# EAGLE board JDM2-2voltage-new-broken (EAGLE 7.6.0)
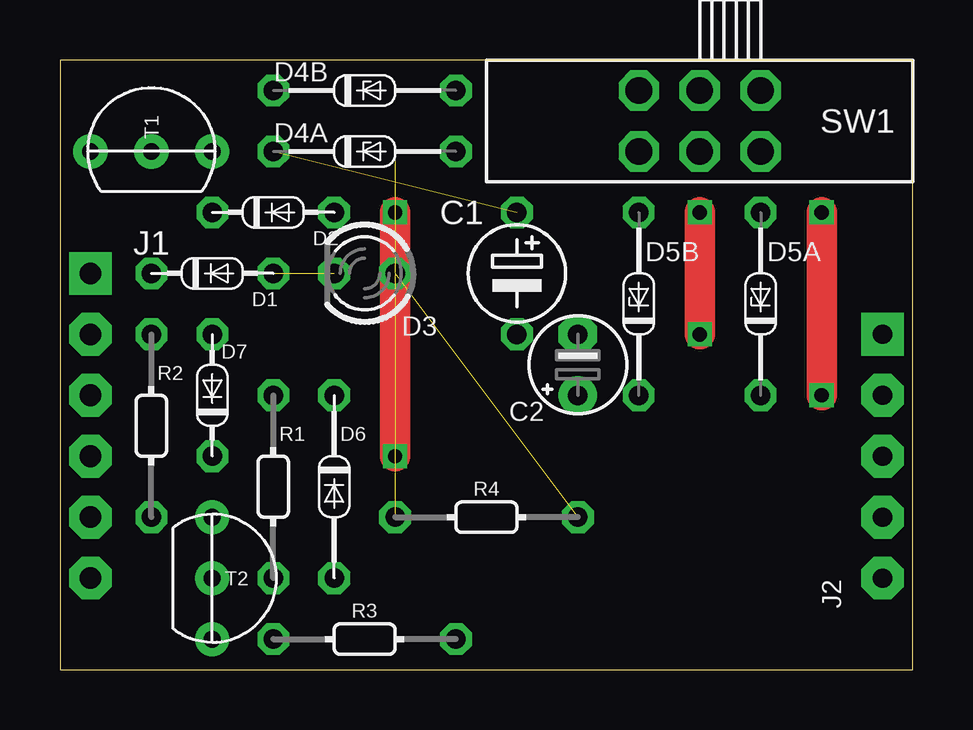
[diagram p0: board, top side]
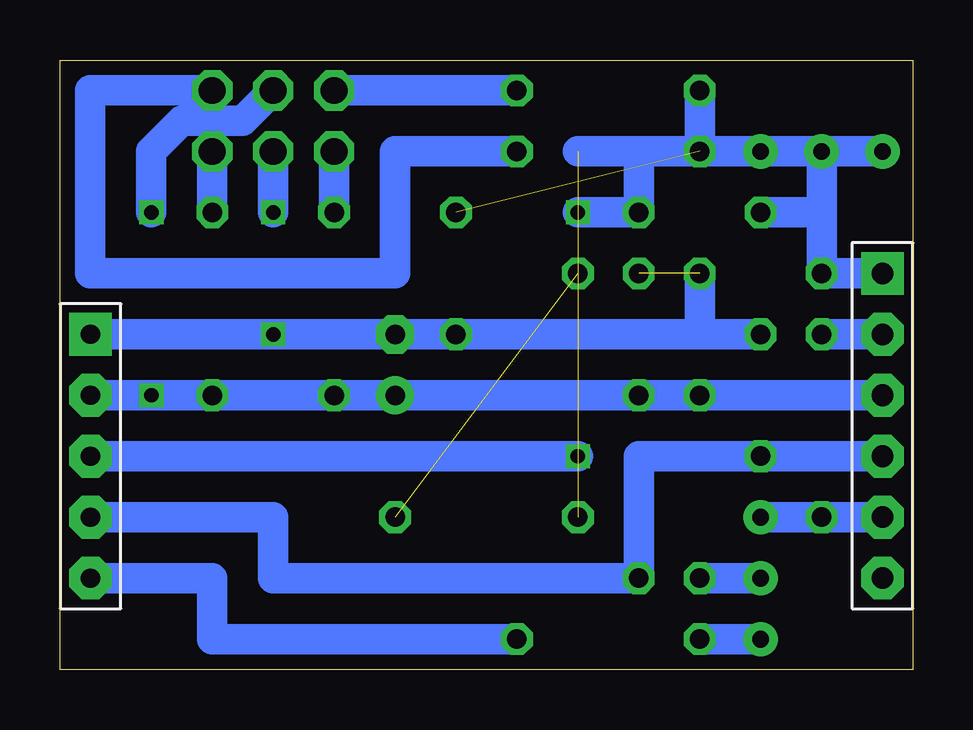
[diagram p1: board, bottom side, seen from below]

Size 35.56 x 25.4 mm. Coordinates in mm from the lower left corner, seen from the top.
Outline: 35.56,0 35.56,25.4 0,25.4 0,0 35.56,0
Copper layers (1*16): Top 0.035mm / dielectric 1.5mm / Bottom 0.035mm
Design rules "default": minimum track width 10mil, minimum drill 24mil, track to track 8mil, track to pad 8mil, pad to pad 8mil, via to via 8mil, smd to smd 8mil, copper to edge 40mil, drill to drill 8mil, minimum pad ring 10mil, minimum via ring 8mil, stop-mask expansion 4mil, vias tented up to drill 0mil, thermal gap 10mil
Net classes: 0 default: width 0.559 mm; 1 power: width 0.559 mm

## Footprints (pad centres in the part's own frame; a part is rotated, then mirrored left to right if it is on the bottom)
E5-4 = drill 0.813 octagon: + 0,2.54; - 0,-2.54
E2,5-4 = drill 0.813 pad 1.6: + 0,-1.27 | drill 0.813 pad 1.6 octagon: - 0,1.27
DO34-5 = drill 0.813 octagon: A 2.54,0; C -2.54,0
LED3MM = drill 0.813 octagon: A -1.27,0; K 1.27,0
DO34Z7 = drill 0.813 octagon: A 3.81,0; C -3.81,0
DO34Z7V = drill 0.813 octagon: A 0,3.81; C 0,-3.81
DO34-7V = drill 0.813 octagon: A 0,3.81; C 0,-3.81
DO34-5V = drill 0.813 octagon: A 0,2.54; C 0,-2.54
RS232-6PIN = drill 0.9 pad 1.778 square: 1 0,0 | drill 0.9 pad 1.778 octagon: 2 2.54,0; 3 5.08,0; 4 7.62,0; 5 10.16,0; 6 12.7,0
PIC-ICSP = drill 0.8 pad 1.778 square: 1 -5.08,0 | drill 0.8 pad 1.778 octagon: 2 -2.54,0; 3 0,0; 4 2.54,0; 5 5.08,0
0202/7-V = drill 0.813 octagon: 1 0,-3.81; 2 0,3.81
0202/7 = drill 0.813 octagon: 1 -3.81,0; 2 3.81,0
SLSW-2P2T-H = drill 1.118 pad 1.524 octagon: 1 2.54,1.27; 2 0,1.27; 3 -2.54,1.27; 4 2.54,-1.27; 5 0,-1.27; 6 -2.54,-1.27
TO92-CBE = drill 0.7 pad 1.422: B 0,0; C 0,2.54; E 0,-2.54

## Placement (x,y rotation side)
C1  100uF  [E5-4]  19.05,16.51 0 top
C2  22uF  [E2,5-4]  21.59,12.7 0 top
D1  1N4148  [DO34-5]  6.35,16.51 0 top
D2  1N4148  [DO34-5]  8.89,19.05 0 top
D3  LED (red)  [LED3MM]  12.7,16.51 180 top
D4A  Z=5.1V  [DO34Z7]  12.7,21.59 0 top
D4B  Z=8.1V  [DO34Z7]  12.7,24.13 0 top
D5A  Z=3.3V  [DO34Z7V]  29.21,15.24 0 top
D5B  Z=5.1V  [DO34Z7V]  24.13,15.24 0 top
D6  1N4148  [DO34-7V]  11.43,7.62 180 top
D7  1N4148  [DO34-5V]  6.35,11.43 0 top
J1  COMPORT-6PIN  [RS232-6PIN]  1.27,16.51 270 top
J2  PIC-ICSPICSP  [PIC-ICSP]  34.29,8.89 270 top
R1  10k  [0202/7-V]  8.89,7.62 0 top
R2  1.5k  [0202/7-V]  3.81,10.16 0 top
R3  100  [0202/7]  12.7,1.27 180 top
R4  3.3k  [0202/7]  17.78,6.35 180 top
SW1  SL-SW-2P-2T-S  [SLSW-2P2T-H]  26.67,22.86 0 top
T1  BC547  [TO92-CBE]  3.81,21.59 90 top
T2  BC547  [TO92-CBE]  6.35,3.81 0 top

## Library data of the parts
C1 C2 = c
D1 D2 D4A D4B D5A D5B D6 D7 = d
D3 = led
J1 J2 = pinconn
R1-R4 = r
SW1 = sw
T1 T2 = t

## Nets
/MCLR: D2.A J2.3 R4.2 T1.E
CLK: D6.A D7.C J1.4 J2.4
CTS: J1.5 R2.1 T2.C
DATA: R3.2 T2.E
GND: C1.- C2.- D1.A D3.K D7.A J2.1 SW1.5
N$1: R1.1 T2.B
N$2: D5A.A SW1.4
N$3: D5B.A SW1.6
N$4: D4A.A SW1.1
N$5: D3.A R4.1
N$6: D4B.A SW1.3
N$7: J1.2 R2.2
PGD: J2.5 R3.1
TXD: D1.C D2.C J1.1 T1.B
VCC: C2.+ D5A.C D5B.C D6.C J1.3 J2.2 R1.2 SW1.2
VPP: C1.+ D4A.C D4B.C T1.C

## Tracks (layer width: path | path; a pad name or v marks a point on that pad's centre or on a via)
/MCLR  (via drill 0.6)  (1 unrouted)
  Top 1.27: v13.97,8.89 v13.97,19.05
  Bottom 1.27: J2.3 v13.97,8.89 | 13.97,21.59 11.43,21.59 | 11.43,21.59 T1.E | v13.97,19.05 D2.A 11.43,21.59
CLK
  Bottom 1.27: J1.4 D7.C 11.43,8.89 D6.A 26.67,3.81 26.67,6.35 J2.4
CTS
  Bottom 1.27: J1.5 R2.1 T2.C
DATA  (via drill 0.6)
  Bottom 1.27: R3.2 T2.E
  other vias: 8.89,1.27 8.89,1.27
GND  (via drill 0.6)  (1 unrouted)
  Top 1.27: v26.67,19.05 v26.67,13.97
  Bottom 1.27: SW1.5 v26.67,19.05 | J2.1 v26.67,13.97 C2.- C1.- 8.89,13.97 | 8.89,13.97 D1.A | D7.A 8.89,13.97
N$1
  Bottom 1.27: R1.1 T2.B
N$2
  Bottom 1.27: D5A.A SW1.4
N$3
  Bottom 1.27: SW1.6 D5B.A
N$4
  Bottom 1.27: SW1.1 34.29,24.13 34.29,16.51 21.59,16.51 21.59,21.59 D4A.A
N$5  (1 unrouted)
N$6
  Bottom 1.27: D4B.A SW1.3
N$7
  Bottom 1.27: R2.2 J1.2
PGD
  Bottom 1.27: J2.5 29.21,3.81 29.21,1.27 R3.1
TXD
  Bottom 1.27: J1.1 D1.C 3.81,19.05 | 3.81,19.05 T1.B | D2.C 3.81,19.05
VCC  (via drill 0.6)
  Top 1.27: v31.75,11.43 v31.75,19.05
  Bottom 1.27: J2.2 v31.75,11.43 D5A.C D5B.C C2.+ D6.C R1.2 J1.3 | v31.75,19.05 31.75,21.59 30.48,22.86 27.94,22.86 SW1.2
VPP  (1 unrouted)
  Bottom 1.27: D4B.C D4A.C T1.C

## Text on the board
Dimension: 10 | 9 | 8 | 7 | 6 | 5 | 4 | 3 | 2 | 1 | 1 | 2 | 3 | 4 | 5 | 6 | 7 | 8 | 9 | 10 | 11 | 12 | 13 | 14 | 14